# EAGLE board ftdi2updiSILKSCREEN (EAGLE 9.6.2)
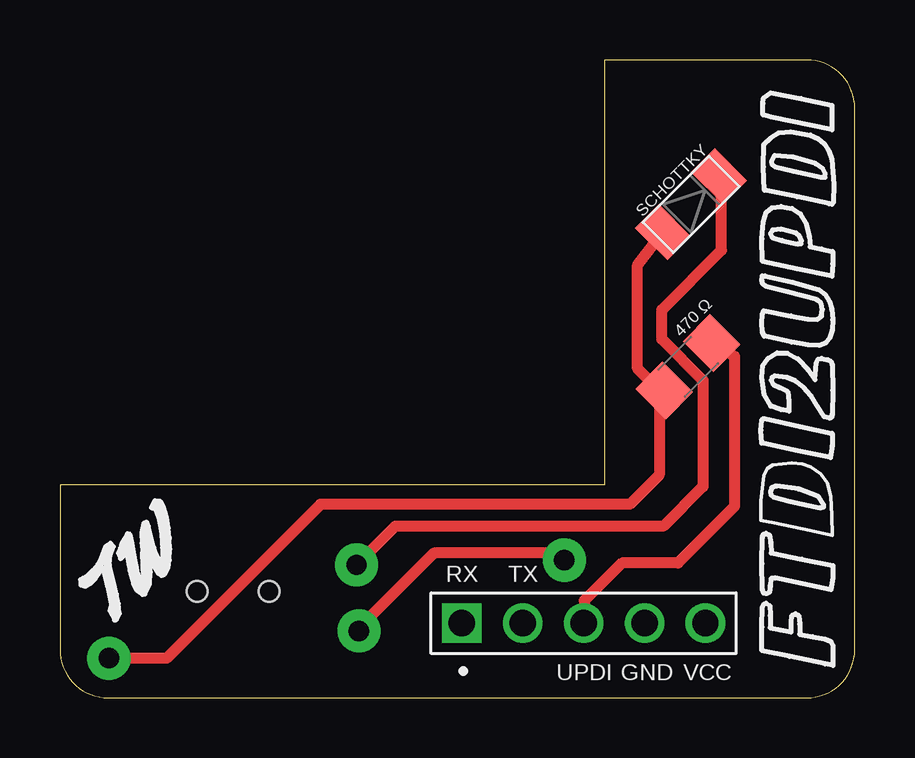
[diagram p0: board, top side]
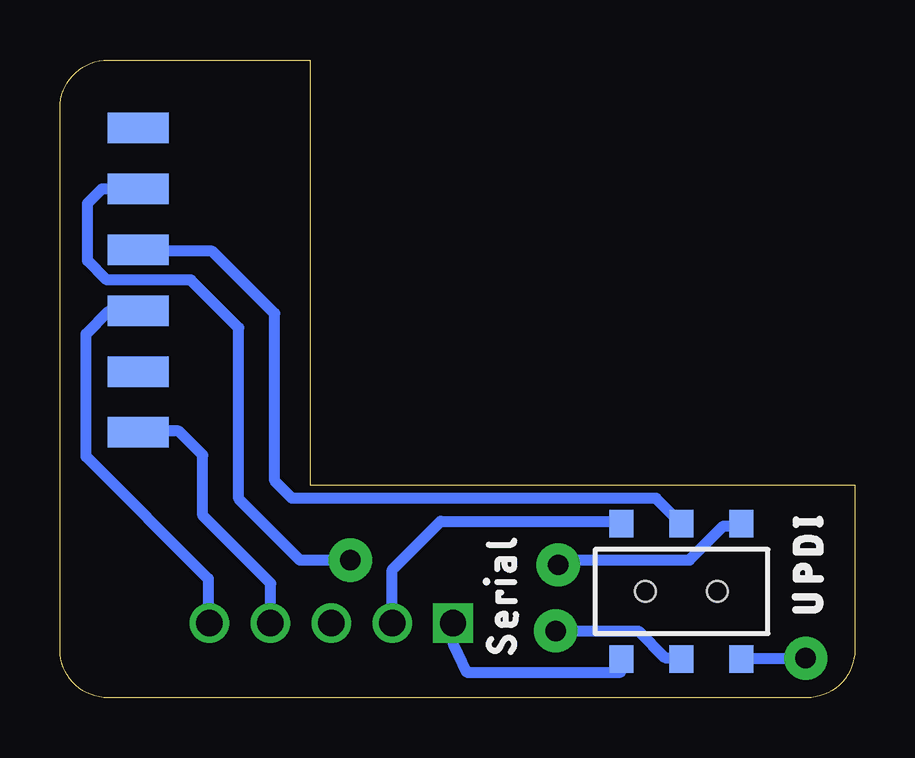
[diagram p1: board, bottom side, seen from below]

Size 33.13 x 26.59 mm. Coordinates in mm from the lower left corner, seen from the top.
Outline: 22.7,26.59 22.7,8.87 0,8.87 0,2 arc90 2,0 31.13,0 arc90 33.13,2 33.13,24.59 arc90 31.13,26.59 22.7,26.59
Copper layers (1*16): Top 0.035mm / dielectric 1.5mm / Bottom 0.035mm
Design rules "default": minimum track width 6mil, minimum drill 0.35mm, track to track 6mil, track to pad 6mil, pad to pad 6mil, via to via 6mil, smd to smd 6mil, copper to edge 40mil, drill to drill 6mil, minimum pad ring 10mil, minimum via ring 8mil, stop-mask expansion 4mil, vias tented up to drill 0mil, thermal gap 10mil
Net classes: 0 default: width 0.457 mm

## Footprints (pad centres in the part's own frame; a part is rotated, then mirrored left to right if it is on the bottom)
MINI-SMA = smd 1.4 x 1.9: ANODE 1.65,0; KATHODE -1.65,0
61300511121 = drill 1.1 square: 1 -5.08,0 | drill 1.1: 2 -2.54,0; 3 0,0; 4 2.54,0; 5 5.08,0
1206 = smd 1.6 x 1.8: 1 -1.4,0; 2 1.4,0
SWITCH_DPDT_SMD_AYZ0202 = smd 1 x 1.15: 1 -2.5,2.825; 2 0,2.825; 3 2.5,2.825; 4 -2.5,-2.825; 5 0,-2.825; 6 2.5,-2.825 | hole 0.85: 1.5,0; -1.5,0
1X06SMD = smd 2.54 x 1.27: 1 0,6.35; 2 0,3.81; 3 0,1.27; 4 0,-1.27; 5 0,-3.81; 6 0,-6.35

## Placement (x,y rotation side)
D1  SCHOTTKY  [MINI-SMA]  26.31,20.57 225 top
J2  61300511121  [61300511121]  21.83,3.11 0 top
R2  470  [1206]  26.18,13.8 45 top
S1  [SWITCH_DPDT_SMD_AYZ0202]  7.22,4.43 0 bottom
U$1  CONN_06_FTDI-SMD-HEADER  [1X06SMD]  29.88,17.41 0 bottom

## Library data of the parts
D1 = eagle_fab
J2 = Headers; CREATED_BY: PCBLayout.com; DIGI_KEY_PART_NUMBER: 732-5318-ND; MANUFACTURER: Wurth Electronics Inc.; MPN: 61300511121
R2 = 01_SparkFun
S1 = SparkFun-Switches; PROD_ID: SWCH-08179; SF_SKU: COM-00597
U$1 = fab_new

## Nets
N$1: S1.2
N$2: S1.5
N$3: D1.ANODE R2.1 S1.6
N$11: S1.3
RX: J2.1 S1.4
S$1: U$1.1
S$3: D1.KATHODE
TX: J2.2 S1.1
UPDI: R2.2

## Tracks (layer width: path | path; a pad name or v marks a point on that pad's centre or on a via)
GND
  Bottom 0.457: 24.35,2.94 24.35,4.77 27.18,7.59 27.18,10.12 28.18,11.12 30.48,11.12
N$1
  Bottom 0.457: S1.2 8.29,8.32 23.46,8.32 24.18,9.04 24.18,16.02 26.78,18.62 29.58,18.62
N$2  (via drill 0.85 pad 1.8)
  Top 0.457: v12.46,2.78 12.46,2.91 15.59,6.04 20.73,6.04 v21.03,5.74
  Bottom 0.457: v12.46,2.78 9.03,2.78 7.91,1.67 7.3,1.67 S1.5 | v21.03,5.74 23.13,5.74 25.68,8.29 25.68,15.42 27.68,17.42 31.18,17.42 31.98,18.22 31.98,20.62 31.38,21.22 29.28,21.22
N$3  (via drill 0.85 pad 1.8)
  Top 0.457: v2.04,1.65 4.45,1.65 10.86,8.06 23.75,8.06 24.98,9.29 24.98,12.51 R2.1 24.98,12.82 24.07,13.72 24.07,18.05 D1.ANODE
  Bottom 0.457: S1.6 4.68,1.65 v2.04,1.65
N$11  (via drill 0.85 pad 1.8)
  Top 0.457: v12.36,5.54 13.97,7.15 25.16,7.15 26.81,8.8 26.81,13.23 25.08,14.95 25.08,16.17 27.58,18.66 27.58,21.62
  Bottom 0.152: 4.86,7.16 S1.3
  Bottom 0.457: 4.86,7.16 5.47,7.16 6.89,5.74 12.16,5.74 v12.36,5.54
RX
  Bottom 0.457: S1.4 9.76,1.07 16.18,1.07 16.75,2.25 J2.1
S$1
  Bottom 0.457: U$1.1 29.98,23.86
S$3
  Top 0.457: 27.42,21.94 D1.KATHODE
TX
  Bottom 0.457: S1.1 9.83,7.36 17.26,7.36 19.29,5.34 J2.2
UPDI
  Top 0.457: R2.2 28.12,14.24 28.12,7.98 25.76,5.62 23.43,5.62 21.86,4.05 21.86,3.18
VCC
  Bottom 0.457: 26.95,2.94 26.95,4.97 32.05,10.06 32.05,15.17 31.09,16.12 29.18,16.12

## Text on the board
tNames: SCHOTTKY | 470 Ω | RX | TX | UPDI | GND | VCC